# Altium PCB JBC_PD.PcbDoc
Units mm, origin at the board's own origin, x right, y up, seen from the top; angles counter-clockwise.
Board outline 70 x 40 mm, 2 copper layers (Top Layer, Bottom Layer); 61 components, 49 nets, 270 pads, 44 vias.
Unrouted connection lines stored in the file: 74.
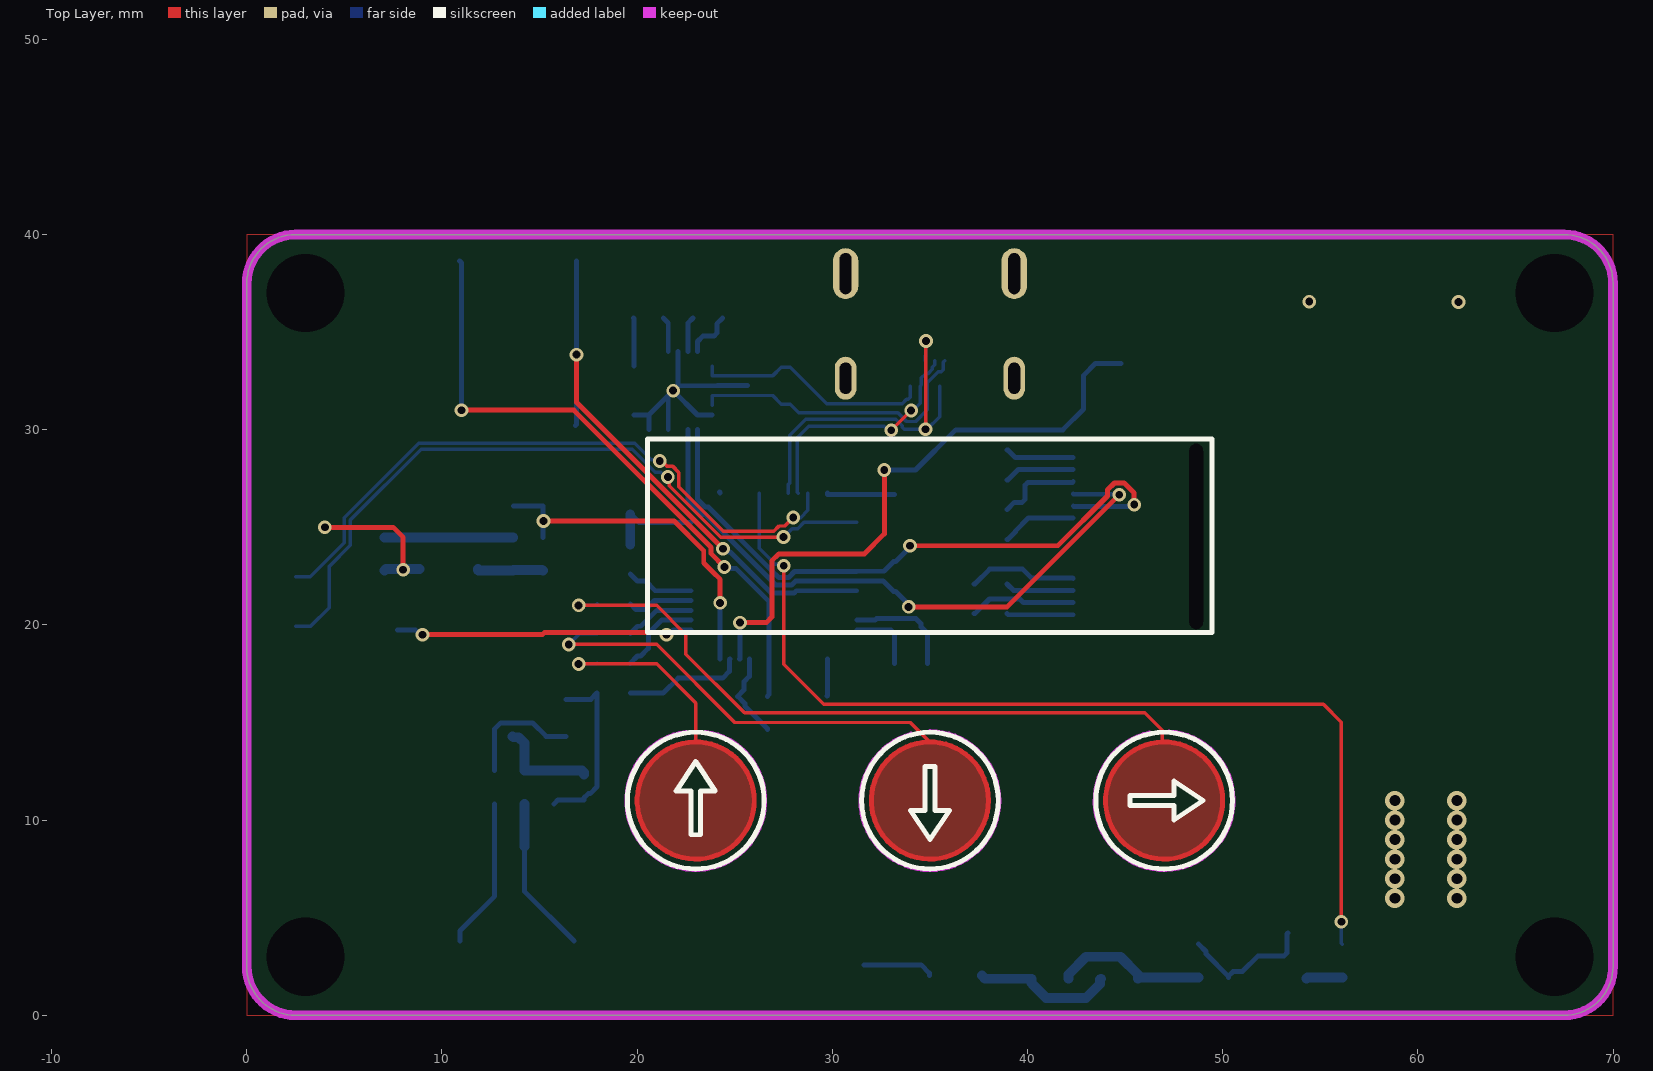
[diagram p0: Top Layer view]
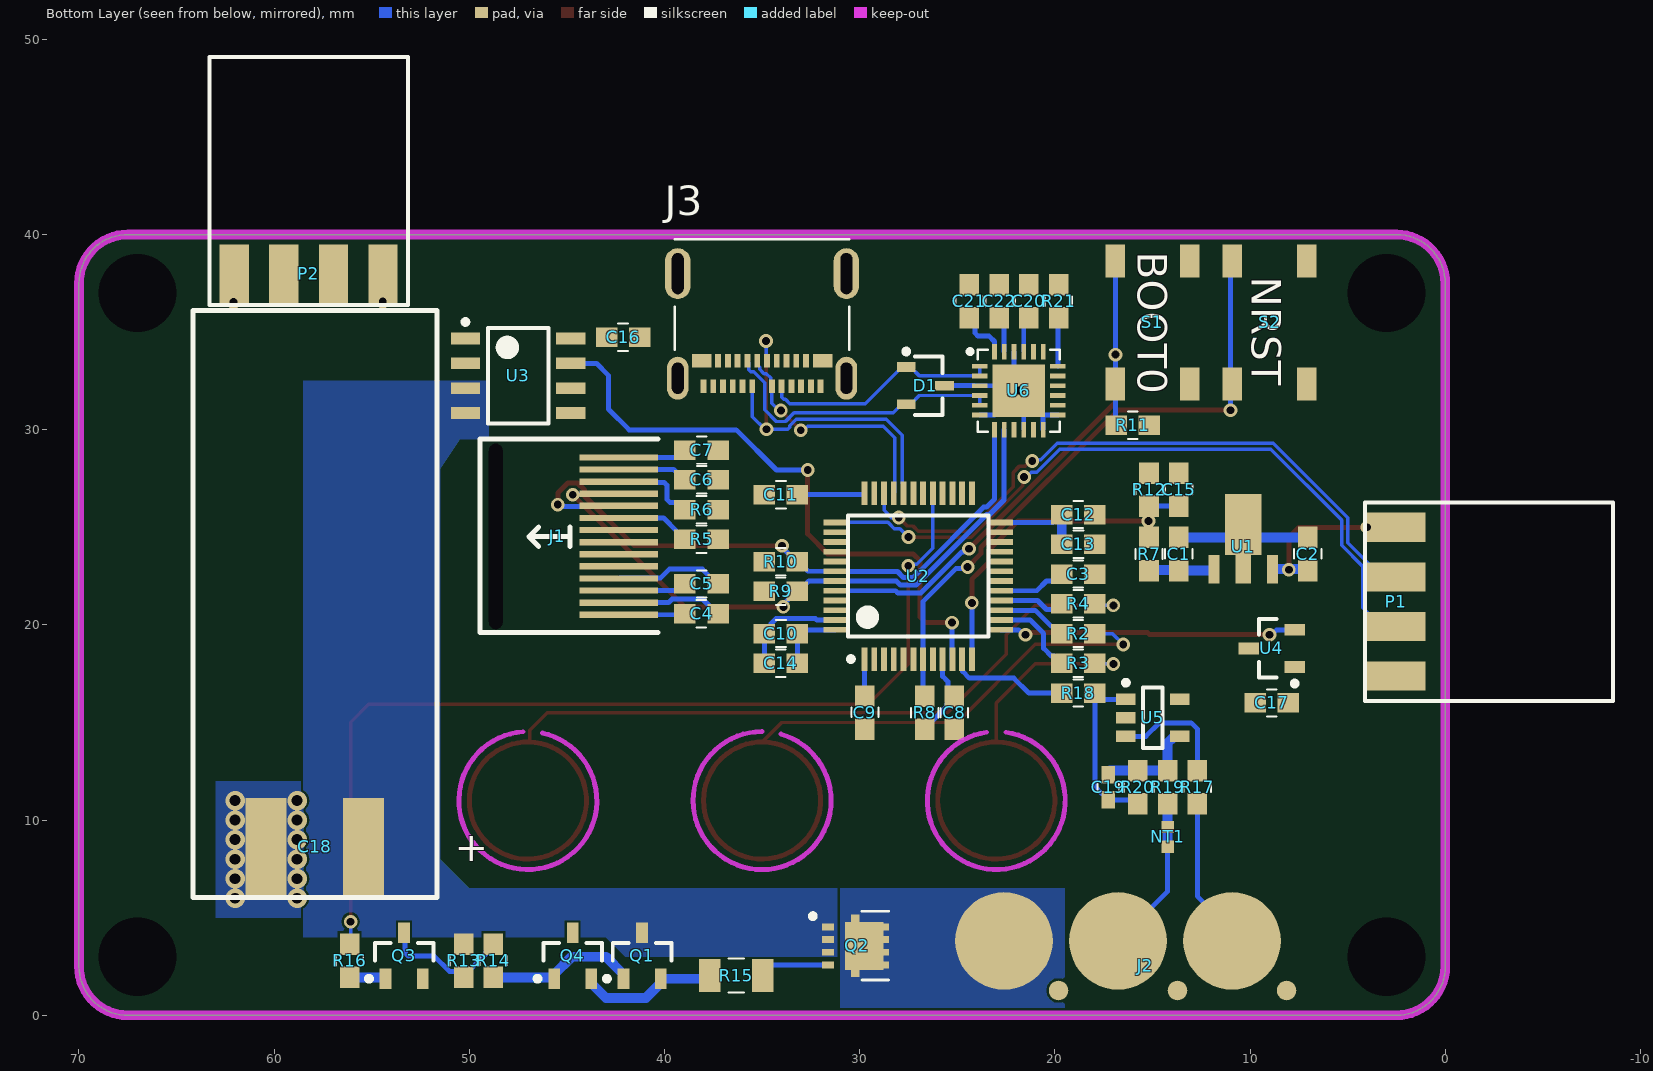
[diagram p1: Bottom Layer view, seen from below]
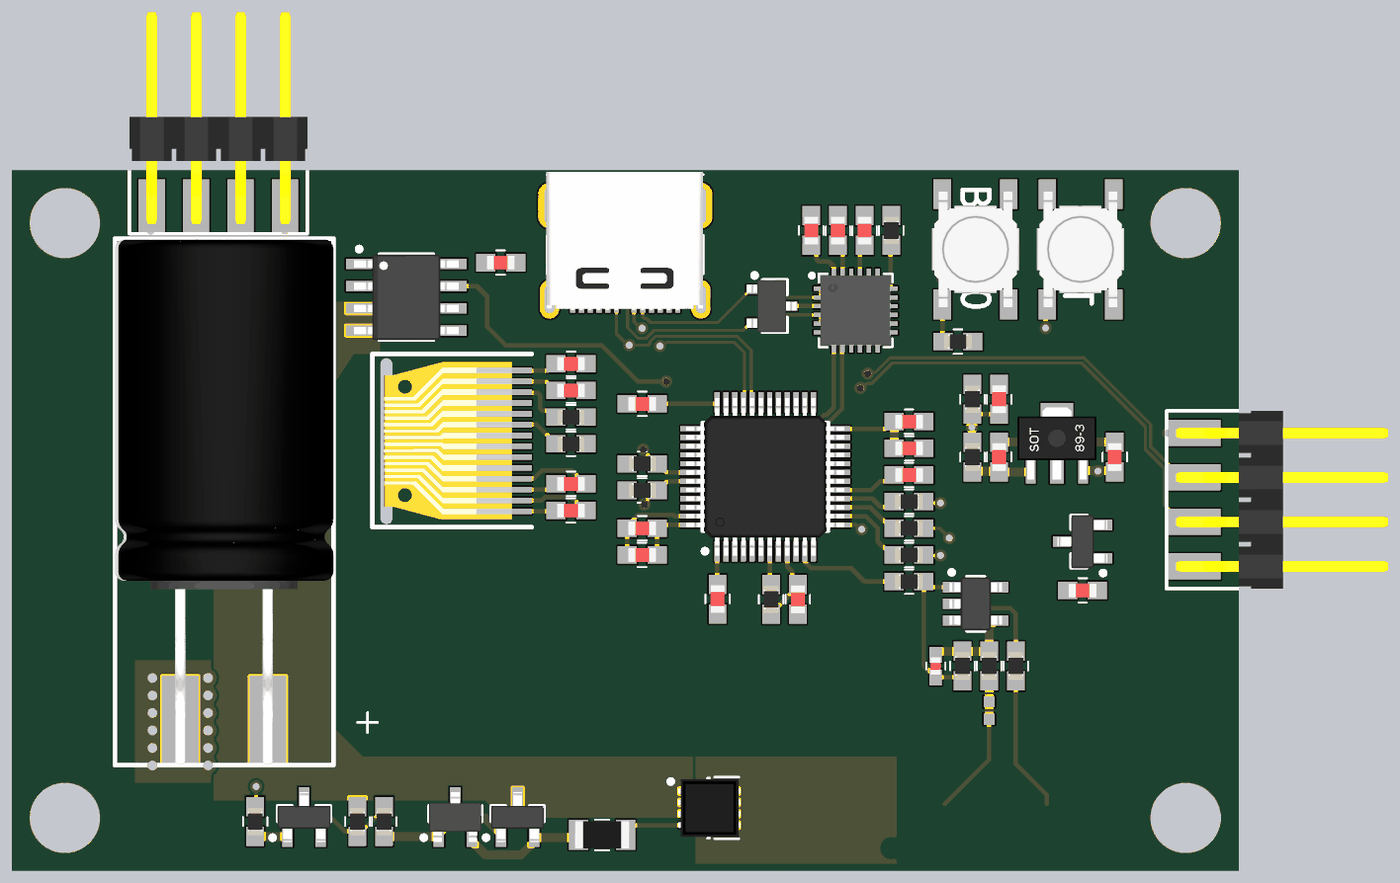
[diagram p2: 3D render of the assembled board from below, using the file's embedded part models]

## Layer stack, top to bottom
Top Solder: solder mask 0.0102, Solder Resist, Dk 3.5
Top Layer: signal copper 0.0356
Dielectric 1: dielectric 0.32, FR-4, Dk 4.8
Bottom Layer: signal copper 0.0356
Bottom Solder: solder mask 0.0102, Solder Resist, Dk 3.5

## Board outline
67.5,40 cw(c67.5,37.5) 70,37.5 70,2.5 cw(c67.5,2.5) 67.5,0 2.5,0 cw(c2.5,2.5) 0,2.5 0,37.5 cw(c2.5,37.5) 2.5,40

## Design rules (kind name [scope] priority, off if disabled: settings)
Clearance [All] p1: gap=0.127 ignorepadtopadclearanceinfootprint=FALSE
DiffPairsRouting [All] p1: maxlimit=0.381 minlimit=0.178 mostfreqgap=0.254 toplayer_minwidth=0.178 toplayer_maxwidth=0.381 toplayer_prefwidth=0.254 bottomlayer_minwidth=0.178 bottomlayer_maxwidth=0.381 bottomlayer_prefwidth=0.254 maxuncoupledlength=12.7
PolygonConnect PolygonConnect_2 [All vs IsNamedPolygon('NONET_L-01_P-001')] p1: connectstyle=Direct reliefconductorwidth=0.254 reliefentries=4 polygonreliefangle="90 Angle" airgapwidth=0.254
PolygonConnect PolygonConnect_1 [All vs IsNamedPolygon('POWER_OUT')] p2: connectstyle=Direct reliefconductorwidth=0.254 reliefentries=4 polygonreliefangle="90 Angle" airgapwidth=0.254
PolygonConnect [All] p3: connectstyle=Relief reliefconductorwidth=0.254 reliefentries=4 polygonreliefangle="90 Angle" airgapwidth=0.254
RoutingVias [All] p1: holewidth=0.711 width=1.27 viastyle="Through Hole" minholewidth=0.4 minwidth=0.7 maxholewidth=0.55 maxwidth=1
SolderMaskExpansion [All] p1: expansion=0.102 istentingtop=FALSE
Width [All] p1: maxlimit=0.508 minlimit=0.178 preferedwidth=0.254
29 further rules are at their usual default settings.

## Classes and differential pairs
component class USB: C20 C21 C22 D1 J3 P2 R21 U6
component class MCU: C1 C2 C3 C4 C5 C6 C7 C8 C9 C10 C11 C12 C13 C14 C15 J1 P1 R2 R3 R4 R5 R6 R7 R8 R9 R10 R11 R12 S1 S2 U1 U2
component class FrontEnd: C16 C17 C18 C19 J2 NT1 Q1 Q2 Q3 Q4 R13 R14 R15 R16 R17 R18 R19 R20 U3 U4 U5
differential pair USB: +USB_P -USB_N

## Components (designator, comment, footprint, x,y, rotation, side; value= is the part's Value field where it differs from the comment)
C1 "C0603 1uF 25V X7R" C0603-IPC 13.652,23.63 r90 bottom value=1uF
C2 "C0603 1uF 25V X7R" C0603-IPC 7.048,23.63 r90 bottom value=1uF
C3 "Cs 10nF 50V X7R" C0603-IPC 18.796,22.606 r0 bottom value=10nF
C4 "C0603 1uF 25V X7R" C0603-IPC 38.1,20.574 r0 bottom value=1uF
C5 "C0603 1uF 25V X7R" C0603-IPC 38.1,22.098 r180 bottom value=1uF
C6 "C0603 1uF 25V X7R" C0603-IPC 38.1,27.432 r180 bottom value=1uF
C7 "C0603 1uF 25V X7R" C0603-IPC 38.1,28.956 r180 bottom value=1uF
C8 "C0603 100nF 25V X7R" C0603-IPC 25.146,15.494 r90 bottom value=100nF
C9 "C0603 100nF 25V X7R" C0603-IPC 29.728,15.508 r90 bottom value=100nF
C10 "C0603 100nF 25V X7R" C0603-IPC 34.036,19.558 r180 bottom value=100nF
C11 "C0603 100nF 25V X7R" C0603-IPC 34.036,26.67 r180 bottom value=100nF
C12 "C0603 100nF 25V X7R" C0603-IPC 18.796,25.654 r0 bottom value=100nF
C13 "C0603 1uF 25V X7R" C0603-IPC 18.796,24.13 r180 bottom value=1uF
C14 "C0603 1uF 25V X7R" C0603-IPC 34.036,18.034 r0 bottom value=1uF
C15 "C0603 100nF 25V X7R" C0603-IPC 13.652,26.932 r270 bottom value=100nF
C16 "C0603 100nF 25V X7R" C0603-IPC 42.11,34.742 r0 bottom value=100nF
C17 "C0603 100nF 25V X7R" C0603-IPC 8.89,16.002 r180 bottom value=100nF
C18 "35ZLH1000MEFC12.5X20" "C-POLARIZED-5-12.5 Horizontal" 57.912,8.636 r180 bottom value=1000uF
C19 "C0402 18pF 50V C0G_1" C0402-IPC 17.272,11.684 r90 bottom value=18pF
C20 "C0603 1uF 10V X7R" C0603-IPC 21.336,36.576 r270 bottom value="1 uF"
C21 "C0603 100nF 25V X7R" C0603-IPC 24.384,36.576 r90 bottom value=100nF
C22 "C0603 1uF 10V X7R" C0603-IPC 22.86,36.576 r270 bottom value="1 uF"
D1 "ESDA25L" SOT23-3L 26.634,32.258 r180 bottom
J1 "0.69\" OLED Monochrome White" "OLED_64x32 Bent" 42.342,20.52 r180 bottom locked
J2 "RPC1-12RB-6P(71)" "HIROSE RPC 1 SMD (WIRE)" -6.096,7.442 r180 bottom
J3 "USB C" "Molex USB-C" 35,36 r0 bottom locked
NT1 "Net Tie" NET_TIE 14.224,9.144 r270 bottom net-tie
P1 "Header 1x4" "HEADER 1X4 SMD 2.54mm" 2.5,25 r270 bottom
P2 "Header 1x4" "HEADER 1X4 SMD 2.54mm" 62.04,38 r180 bottom
Q1 "MMBT3904LT1G" SOT23-MMBT3904 41.148,3.048 r90 bottom
Q2 "AON7401" DFN3x3A_8L_EP1_P 31.626,2.581 r180 bottom
Q3 "MMBT3904LT1G" SOT23-MMBT3904 53.34,3.048 r90 bottom
Q4 "MMBT3906LT1G" SOT23-Generic 44.704,3.048 r90 bottom
R2 "R0603 1K 1%" R0603-IPC 18.796,19.558 r0 bottom value=1k
R3 "R0603 1K 1%" R0603-IPC 18.796,18.034 r0 bottom value=1k
R4 "R0603 1K 1%" R0603-IPC 18.796,21.082 r0 bottom value=1k
R5 "R0603 10K 1%" R0603-IPC 38.1,24.384 r0 bottom value=10k
R6 "R0603 560K 1%" R0603-IPC 38.1,25.908 r0 bottom value=560k
R7 "R0603 560K 1%" R0603-IPC 15.176,23.63 r270 bottom value=560k
R8 "R0603 10K 1%" R0603-IPC 26.67,15.494 r270 bottom value=10k
R9 "R0603 10K 1%" R0603-IPC 34.036,21.717 r0 bottom value=10k
R10 "R0603 10K 1%" R0603-IPC 34.036,23.241 r0 bottom value=10k
R11 "R0603 10K 1%" R0603-IPC 16.002,30.226 r0 bottom value=10k
R12 "R0603 100K 1%" R0603-IPC 15.176,26.932 r270 bottom value=100k
R13 "R0603 2.37K 1%" R0603-IPC 50.292,2.794 r90 bottom value=2.37k
R14 "R0603 2.37K 1%" R0603-IPC 48.768,2.794 r270 bottom value=2.37k
R15 "R1206 20 1%" R1206-IPC 36.322,2.032 r180 bottom value=20
R16 "R0603 2.37K 1%" R0603-IPC 56.134,2.794 r270 bottom value=2.37k
R17 "R0603 100K 1%" R0603-IPC 12.7,11.684 r90 bottom value=100k
R18 "R0603 2.37K 1%" R0603-IPC 18.796,16.51 r180 bottom value=2.37k
R19 "R0603 2.37K 1%" R0603-IPC 14.224,11.684 r270 bottom value=2.37k
R20 "RC0603FR-07750KL" R0603-IPC 15.748,11.684 r90 bottom value=750K
R21 "R0603 1K 1%" R0603-IPC 19.812,36.576 r90 bottom value=1k
S1 "BOOT0" TL3342F260QG 15,35.5 r90 bottom
S2 "NRST" TL3342F260QG 9,35.5 r90 bottom
U1 "AP2204R-3.3TRG1" SOT-89 10.35,22.854 r180 bottom
U2 "STM32F072CXXX MCU" LQFP48 27,22.5 r90 bottom locked
U3 "ACS722LLCTR-05AB-T" SOIC127P600X175-8N 47.498,32.766 r180 bottom
U4 "MCP9700AT-ETT" SOT23 8.89,18.796 r0 bottom
U5 "OPA374AIDBVR" DBV0005A 14.986,15.24 r180 bottom
U6 "STUSB4500" "QFN24 - 4X4MM - PITCH 0.5MM - EXPOSEDPAD" 21.844,32.004 r180 bottom locked

## Footprints (in the part's own frame and the unit in brackets; to place one, negate y for a bottom-side part, rotate by r counter-clockwise, add the part's x,y. Pads: shape width x height; smd on the part's side, far side on the other; paste and mask are expansions set on the pad)
C0402-IPC [mm]
  rect 0.9x0.7 smd: 1(-0.65,0) 2(0.65,0)
  silkscreen extent -0.2,-0.55 0.2,0.55, body extent -0.5,-0.3 0.5,0.3, height 0.2
C0603-IPC [mm]
  rect 1.1x1 smd: 1(-0.85,0) 2(0.85,0)
  silkscreen extent -0.24,-0.7 0.26,0.7, body extent -0.8,-0.4 0.8,0.4, height 0.3
"C-POLARIZED-5-12.5 Horizontal" [mm] "Flat Mount Through-hole Capacitor"
  rect 2.1x5 smd: 1(2.5,-0.012) 2(-2.5,-0.012)
  silkscreen extent -6.24,-2.61 6.26,27.48, body extent -6.25,-2.57 6.25,27.43, height 12.52
DBV0005A [mm] "SOT23, 5-Leads, Body 2.90x2.80mm, Pitch 0.95mm, IPC Medium Density"
  rect 1x0.6 smd mask+0.075: 1(-1.375,0.95) 2(-1.375,0) 3(-1.375,-0.95) 4(1.375,-0.95) 5(1.375,0.95)
  silkscreen extent -1.5,-1.55 0.5,1.92, body extent -1.5,-1.53 1.5,1.53, height 1.45
DFN3x3A_8L_EP1_P [mm] "AON7401 P-Mos"
  rect 0.43x3.21 smd paste-3 mask+0: D(1.4,0.975)
  rect 1.98x2.45 smd paste-0.2: D(1.854,0.975)
  rect 0.3x0.35 smd: D(2.985,0) D(2.985,0.65) D(2.985,1.3) D(2.985,1.95)
  rect 0.6x0.35 smd: G(0,0) S(0,0.65) S(0,1.3) S(0,1.95)
  silkscreen extent -0.9,-0.77 3.1,2.75, body extent -0.34,-0.79 3.21,2.76, height 1.03
"HEADER 1X4 SMD 2.54mm" [mm] "Connector; Header; 4 Position"
  rect 1.5x3 smd: 1(0,0) 2(2.54,0) 3(5.08,0) 4(7.62,0)
  silkscreen extent -1.27,-1.6 8.89,11.1, body extent -1.27,-1.05 8.89,11.05, height 2.54
"HIROSE RPC 1 SMD (WIRE)" [mm] "6 Pin JBC Connector"
  round 5 smd: 1(-22.86,-3.632) 2(-17.018,-3.632) 5(-28.702,-3.632)
  round 1 smd: 3(-25.908,-6.172) 4(-19.812,-6.172) 6(-14.224,-6.172)
LQFP48 [mm] "TSQFP, 48-Leads, Body 7.00x8.00mm, Pitch 0.50mm, IPC Medium Density"
  rect 1.2x0.3 smd: 1(-4.25,2.75) 2(-4.25,2.25) 3(-4.25,1.75) 4(-4.25,1.25) 5(-4.25,0.75) 6(-4.25,0.25) 7(-4.25,-0.25) 8(-4.25,-0.75) 9(-4.25,-1.25) 10(-4.25,-1.75) 11(-4.25,-2.25) 12(-4.25,-2.75) 25(4.25,-2.75) 26(4.25,-2.25) 27(4.25,-1.75) 28(4.25,-1.25) 29(4.25,-0.75) 30(4.25,-0.25) 31(4.25,0.25) 32(4.25,0.75) 33(4.25,1.25) 34(4.25,1.75) 35(4.25,2.25) 36(4.25,2.75)
  rect 0.3x1.2 smd: 13(-2.75,-4.25) 14(-2.25,-4.25) 15(-1.75,-4.25) 16(-1.25,-4.25) 17(-0.75,-4.25) 18(-0.25,-4.25) 19(0.25,-4.25) 20(0.75,-4.25) 21(1.25,-4.25) 22(1.75,-4.25) 23(2.25,-4.25) 24(2.75,-4.25) 37(2.75,4.25) 38(2.25,4.25) 39(1.75,4.25) 40(1.25,4.25) 41(0.75,4.25) 42(0.25,4.25) 43(-0.25,4.25) 44(-0.75,4.25) 45(-1.25,4.25) 46(-1.75,4.25) 47(-2.25,4.25) 48(-2.75,4.25)
  silkscreen extent -4.37,-3.6 3.1,3.6, body extent -4.51,-4.51 4.51,4.51, height 1.5
"Molex USB-C" [mm] "MOLEX_105450-0101"
  rect 0.3x0.7 smd: A1(-3,3.77) A2(-2.5,3.77) A3(-2,3.77) A4(-1.5,3.77) A5(-1,3.77) A6(-0.5,3.77) A7(0.5,3.77) A8(1,3.77) A9(1.5,3.77) A10(2,3.77) A11(2.5,3.77) A12(3,3.77) B2(2.25,2.47) B3(1.75,2.47) B4(1.25,2.47) B5(0.75,2.47) B6(0.25,2.47) B7(-0.25,2.47) B8(-0.75,2.47) B9(-1.25,2.47) B10(-1.75,2.47) B11(-2.25,2.47)
  rect 1x0.7 smd: B1(3.1,2.47) B12(-3.1,2.47)
  oval 1.1x2.2 hole 0.6 slot 1.6 at 90 deg: S1(-4.32,3.36) S2(4.32,3.36)
  oval 1.3x2.6 hole 0.6 slot 2.1 at 90 deg: S3(-4.32,-2) S4(4.32,-2)
  silkscreen extent -4.47,-3.77 4.47,1.9, body extent -4.44,-3.92 4.5,3.98, height 3.22
NET_TIE [mm]
  rect 0.635x0.635 smd: 1(-0.5,0) 2(0.5,0)
  Top Layer lines w0.508: 0.5,0 -0.5,0
"OLED_64x32 Bent" [mm] "0.69\" OLED Bent"
  rect 4x0.32 smd: 1(0,0) 2(0,0.62) 3(0,1.24) 4(0,1.86) 5(0,2.48) 6(0,3.1) 7(0,3.72) 8(0,4.34) 9(0,4.96) 10(0,5.58) 11(0,6.2) 12(0,6.82) 13(0,7.44) 14(0,8.06)
  rect 0x0 hole 9.5 slot 0.7 at 0 deg unplated: 7(-6.3,4.015)
  silkscreen extent -7.1,-0.9 2,9, body extent -6.47,-0.47 21.47,8.53, height 1.51
"QFN24 - 4X4MM - PITCH 0.5MM - EXPOSEDPAD" [mm] "QFN24 - 4X4mm - pitch 0.5mm - ExposedPAD"
  rect 2.7x2.7 smd: 0(0,0)
  rect 0.8x0.25 smd: 1(-2,1.25) 2(-2,0.75) 3(-2,0.25) 4(-2,-0.25) 5(-2,-0.75) 6(-2,-1.25) 13(2,-1.25) 14(2,-0.75) 15(2,-0.25) 16(2,0.25) 17(2,0.75) 18(2,1.25)
  rect 0.25x0.8 smd: 7(-1.25,-2) 8(-0.75,-2) 9(-0.25,-2) 10(0.25,-2) 11(0.75,-2) 12(1.25,-2) 19(1.25,2) 20(0.75,2) 21(0.25,2) 22(-0.25,2) 23(-0.75,2) 24(-1.25,2)
  silkscreen extent -2.6,-2.1 2.1,2.1, body extent -2,-2 2,2, height 1
R0603-IPC [mm]
  rect 1.1x1 smd: 1(-0.85,0) 2(0.85,0)
  silkscreen extent -0.25,-0.7 0.25,0.7, body extent -0.77,-0.43 0.78,0.43, height 0.44
R1206-IPC [mm]
  rect 1.1x1.7 smd: 1(-1.35,0) 2(1.35,0)
  silkscreen extent -0.4,-0.87 0.4,0.87, body extent -1.55,-0.77 1.55,0.78, height 0.55
SOIC127P600X175-8N [mm] "SOIC, 8-Leads, Body 4.90x3.90mm, Pitch 1.27mm, IPC Medium Density"
  rect 1.5x0.6 smd: 1(-2.7,1.905) 2(-2.7,0.635) 3(-2.7,-0.635) 4(-2.7,-1.905) 5(2.7,-1.905) 6(2.7,-0.635) 7(2.7,0.635) 8(2.7,1.905)
  silkscreen extent -2.83,-2.45 1.55,2.88, body extent -3,-2.45 3,2.45, height 1.75
SOT23 [mm] "SOT23, 3-Leads, Body 2.92x2.37mm, Pitch 0.95mm, IPC Medium Density"
  rect 1.05x0.6 smd: 1(-1.175,0.95) 2(-1.175,-0.95) 3(1.175,0)
  silkscreen extent -1.3,-1.5 0.65,1.92, body extent -1.42,-1.52 1.42,1.52, height 1.11
SOT23-3L [mm] "SOT23, 3-Leads, Body 2.90x2.55mm, Pitch 0.95mm, IPC Medium Density"
  rect 0.95x0.5 smd: 1(-0.98,0.95) 2(-0.98,-0.95) 3(0.98,0)
  silkscreen extent -1.11,-1.5 0.87,1.87, body extent -1.42,-1.5 1.42,1.5, height 1.2
SOT23-Generic [mm] "SOT23, 3-Leads, Body 2.92x2.37mm, Pitch 0.95mm, IPC Medium Density"
  rect 1.05x0.6 smd: 1(-1.175,0.95) 2(-1.175,-0.95) 3(1.175,0)
  silkscreen extent -1.3,-1.5 0.65,1.93, body extent -1.42,-1.5 1.42,1.5, height 1.17
SOT23-MMBT3904 [mm] "SOT23, 3-Leads, Body 2.92x2.37mm, Pitch 0.95mm, IPC Medium Density"
  rect 1.05x0.6 smd: 1(-1.175,0.95) 2(-1.175,-0.95) 3(1.175,0)
  silkscreen extent -1.3,-1.5 0.65,1.93, body extent -1.42,-1.52 1.42,1.52, height 1.11
SOT-89 [mm] "SOT-89 for AP2204R"
  rect 0.55x1.475 smd: 1(-1.5,0) 3(1.5,0)
  rect 0.8x1.475 smd: 2(0,0)
  rect 1.85x3.125 smd: 2(0,2.3)
  body extent -2.25,-0.5 2.25,3.6, height 1.5
TL3342F260QG [mm] "SWITCH TACTILE SPST-NO 0.05A 12V"
  rect 1.7x1 smd: 1(-3.15,-1.9) 2(3.15,-1.9) 3(-3.15,1.9) 4(3.15,1.9)
  body extent -3.3,-2.5 3.3,2.5, height 1.46

## Part data
C1 C2 C4 C5 C6 C7 C13 C14: "CAP CER 1UF 25V X7R 0603", Max. Voltage=25V, Supplier Part Number 1=445-173615-1-ND, EIA Code=X7R, Features="Soft Termination", Supplier 1=Digi-Key
C3: library part "C0603 10nF 50V X7R", "CAP CER 10000PF 50V X7R 0603", Max. Voltage=50V, Supplier Part Number 1=490-10892-1-ND, EIA Code=X7R, Features="Soft Termination", Supplier 1=Digi-Key
C8 C9 C10 C11 C12 C15 C16 C17 C21: "Chip Capacitor, 0603, 100nF, 25V, X7R", Max. Voltage=25V, Supplier Part Number 1=490-1524-1-ND, EIA Code=X7R, Supplier 1=Digi-Key
C18: library part "C-THT 1000uF 35V Electrolytic", "1000uF ±20% 35V 12.5x20 10000Hrs @ 105℃ Radial,12.5x20mm Aluminum Electrolytic Capacitors - Leaded RoHS", Supplier Part Number 1=1189-1888-ND, Supplier 1=Digi-Key, Supplier 2=Mouser, Supplier 3=LCSC, Supplier Part Number 2=232-LH1000MEFC125X20, Supplier Part Number 3=C338194
C19: "Chip Capacitor, 0402, 18pF, 25V, C0G", Max. Voltage=25V, Supplier Part Number 1=399-14427-1-ND, EIA Code=C0G, Supplier 1=Digi-Key
C20 C22: "Chip Capacitor, 0603, 1uF +/- 0.1uF, 10V, X7R", Max. Voltage=10V, Supplier Part Number 1=1276-1946-1-ND, EIA Code=X7R, Supplier 1=Digi-Key
D1: "Dual Transil Array For ESD Protection in SOT23-3 Vbr = 25V", Manufacturer=STMicroelectronics, Supplier Part Number 1=497-4642-1-ND, Manufacturer Part Number=ESDA25L, Supplier 1=Digi-Key, Supplier 2=Mouser, Supplier 3=LCSC, Supplier Part Number 2=511-ESDA25L, Supplier Part Number 3=C95343
J1: library part OLED_64x32, "0.69\" OLED Direct Solder Monochrome White", Manufacturer Part Number=UG-9616TSWCG02, Supplier Part Number 1=C88335, Supplier 1=LCSC
J2: library part "Hirose RPC1", "6 Position Circular Connector Receptacle, Male Pins Solder Cup (JBC Iron Conn)", Supplier Part Number 1=HR1817-ND, Supplier 1=Digi-Key, Supplier 2=Mouser, Supplier Part Number 2=798-RPC112RB6P71
J3: "USB-C USB 3.1 Gen 2, Superspeed+_ Receptacle Connector 24 Position Surface Mount, Right Angle; Through Hole", Package=None, Supplier Part Number 1=WM12856CT-ND, Digi-Key_Part_Number=WM12856CT-ND, Digi-Key_Purchase_URL=https://www.digikey.tw/product-detail/en/molex/1054500101/WM12856CT-ND/5843891?utm_source=snapeda&utm_medium=aggregator&utm_campaign=symbol, MF=Molex, MP=1054500101, SnapEDA_Link=https://www.snapeda.com/parts/1054500101/Molex/view-part/448528/?ref=snap, Supplier 1=Digi-Key, Supplier 2=Mouser, Supplier 3=LCSC, Supplier Part Number 2=538-105450-0101, Supplier Part Number 3=C134092
P1 P2: "Header, 4-Pin", LatestRevisionDate=17-Jul-2002, LatestRevisionNote="Re-released for DXP Platform.", Publisher="Altium Limited"
Q1 Q3: "Bipolar (BJT) Transistor NPN 40V 200mA 300MHz 300mW Surface Mount SOT-23-3 (TO-236)", Supplier Part Number 1=MMBT3904LT1GOSDKR-ND, I_max=200mA, Supplier 1=Digi-Key, Supplier 2=Mouser, Supplier 3=LCSC, Supplier Part Number 2=863-MMBT3904LT1G, Supplier Part Number 3=C81464, V_brkdown=40V
Q2: "P-Channel 30V 12A (Ta), 35A (Tc) 3.1W (Ta), 29W (Tc) Surface Mount 8-DFN (3x3)", Supplier Part Number 1=785-1302-1-ND, Supplier 1=Digi-Key, Supplier 3=LCSC, Supplier Part Number 3=C124890
Q4: "Bipolar (BJT) Transistor PNP 40V 200mA 250MHz 300mW Surface Mount SOT-23-3 (TO-236)", Supplier Part Number 1=MMBT3906LT1GOSCT-ND, Supplier 1=Digi-Key, Supplier 2=Mouser, Supplier 3=LCSC, Supplier Part Number 2=863-MMBT3906LT1G, Supplier Part Number 3=C53444
R2 R3 R4 R21: "RES SMD 1K OHM 1% 1/10W 0603", Operating Temperature="-55°C ~ 155°C", Supplier Part Number 1=RMCF0603FG1K00CT-ND, Temperature Coefficient=±100ppm/°C, Tolerance=±1%, Features="Automotive AEC-Q200", Supplier 1=Digi-Key
R5 R8 R9 R10 R11: "RES SMD 10K OHM 1% 1/10W 0603", Supplier Part Number 1=RMCF0603FT10K0CT-ND, Supplier 1=Digi-Key
R6 R7: "RES 560K OHM 1% 1/10W 0603", Supplier Part Number 1=RMCF0603FT560KCT-ND, Supplier 1=Digi-Key
R12 R17: "RES SMD 100K OHM 1% 1/10W 0603", Supplier Part Number 1=RMCF0603FT100KCT-ND, Supplier 1=Digi-Key
R13 R14 R16 R18 R19: "RES SMD 2.37K OHM 1% 1/10W 0603", Supplier Part Number 1=P2.37KHCT-ND, Supplier 1=Digi-Key, Supplier 2=Mouser, Supplier 3=LCSC, Supplier Part Number 2=667-ERJ-3EKF2371V, Supplier Part Number 3=C403087
R15: "Chip Resistor, 1206, 20 ohms, 0.5W", Manufacturer="Stackpole Electronics Inc.", Manufacturer Part Number=RNCP1206FTD20R0, Supplier Part Number 1=RNCP1206FTD20R0CT-ND, Supplier 1=Digi-Key
R20: library part "R0603 750K 1%", "RES SMD 750K OHM 1% 1/10W 0603", Operating Temperature="-55°C ~ 155°C", Supplier Part Number 1=311-750KHRCT-ND, Temperature Coefficient=±100ppm/°C, Tolerance=±1%, Supplier 1=Digi-Key, Supplier 2=Mouser, Supplier 3=LCSC, Supplier Part Number 2=603-RC0603FR-07750KL, Supplier Part Number 3=C137684
S1 S2: library part "SWITCH TACTILE SPST", "SWITCH TACTILE SPST-NO 0.05A 12V", Manufacturer Part Number=TL3342F260QG, Supplier Part Number 1=EG5470CT-ND, Supplier 1=Digi-Key
U1: library part AP2204R, "Fixed 24V 3.3V 150mA SOT-89(SOT-89-3) Low Dropout Regulators(LDO)", Supplier Part Number 1=AP2204R-3.3TRG1DICT-ND, Supplier 1=Digi-Key, Supplier 2=Mouser, Supplier 3=LCSC, Supplier Part Number 2=621-AP2204R-3.3TRG1, Supplier Part Number 3=C156303
U2: library part STM32F072CXXX, "32-Bit FLASH ARM® Cortex®-M0 48MHz 1.65V ~ 3.6V LQFP-48_7x7x05P ST Microelectronics RoHS", Supplier Part Number 1=497-18747-1-ND, Supplier 1=Digi-Key, Supplier 2=Mouser, Supplier 3=LCSC, Supplier Part Number 2=511-STM32F072CBT6TR, Supplier Part Number 3=C81720
U3: library part ACS722, "Current Sensor 5A 1 Channel Hall Effect, Open Loop Bidirectional 8-SOIC (0.154\", 3.90mm Width)", Supplier Part Number 1=620-1634-1-ND, Supplier 1=Digi-Key, Supplier 3=LCSC, Supplier Part Number 3=C116613
U4: "Temperature Sensor Analog, Local -40°C ~ 125°C 10mV/°C SOT-23-3", Supplier Part Number 1=MCP9700AT-E/TTCT-ND, Supplier 1=Digi-Key, Supplier 2=Mouser, Supplier 3=LCSC, Supplier Part Number 2=579-MCP9700AT-E/TT, Supplier Part Number 3=C127949
U5: library part OPA374, "General Purpose 1 2.3V ~ 5.5V, ±1.15V ~ 2.75V 585uA 6.5MHz 5 V/us SOT-23-5 Precision OpAmps RoHS", Supplier Part Number 1=296-39129-1-ND, Supplier 1=Digi-Key, Supplier 2=Mouser, Supplier 3=LCSC, Supplier Part Number 2=595-OPA374AIDBVR, Supplier Part Number 3=C111859
U6: library part STUSB4500QTR, "Standalone USB PD controller  with SINK auto-run mode in QFN24 4x4mm", Manufacturer=STMicroelectronics, Supplier Part Number 1=497-18060-1-ND, Manufacturer’s ordering code=STUSB4500QTR, Part Number="Standalone USB PD controller  with SINK auto-run mode in QFN24 4x4mm", Supplier 1=Digi-Key, Supplier 2=Mouser, Supplier Part Number 2=511-STUSB4500QTR

## Free pads (board coordinates)
  round 0 hole 4: 2(3,3) 2(3,37) 2(67,3) 2(67,37)

## Via types
v1: diameter 0.7, hole 0.4, Top Layer to Bottom Layer, tented both sides, 31 vias
v2: diameter 1, hole 0.55, Top Layer to Bottom Layer, tented both sides, 12 vias
v3: diameter 0.7, hole 0.4, Top Layer to Bottom Layer, tented top, 1 vias

## Nets (pads, with @x,y where several pads share a name; then routed paths per layer and width w, separated by ;. In a path a pad name is that pad's centre, name@x,y a point inside that pad or via, vN(x,y) a via of type N, cw(c..) or ccw(c..) an arc to the next point about the centre after c; other vN are vias at no path point)
+3V3: C2.1 C8.2 C9.2 C10.2 C11.2 C12.2 C13.1 C14.1 C16.2 C17.2 J1.5 J1.8 P1.1 R5.1 R8.2 R9.2 R10.2 S1.1 S1.2 U1.3 U2.1 U2.9 U2.24 U2.36 U2.48 U3.8 U4.1 U5.5 | length 25.9
  Top Layer w0.254: v1(4,25) 7.5,25 8.009,24.491 v1(8.009,22.823)
  Bottom Layer w0.254: C12.2 19.696,25.654 20.1,25.25 U2.24 ; U2.9 25.75,17.368 25.476,17.094 25.476,16.674 C8.2 25.519,15.971 25.519,15.845 26.67,14.694 R8.2 ; C9.2 29.75,16.38 U2.1 ; U2.36 29.75,26.693 29.773,26.67 C11.2 ; U2.48 32.994,19.75 C10.2 C14.1
  Bottom Layer w0.508: C2.1 7.122,22.854 U1.3 ; C13.1 C12.2
BOOT0: R11.2 S1.3 S1.4 U2.44 | length 29.3
  Top Layer w0.254: v1(16.892,33.847) 16.892,31.403 v1(24.397,23.897)
  Bottom Layer w0.254: R11.2 16.9,30.274 S1.3 S1.4 ; v1(24.397,23.897) 24.518,23.897 24.678,23.737 24.763,23.737 26.866,21.634 28.041,21.634 28.157,21.75 U2.44
GND: C1.2 C2.2 C3.1 C6.2 C7.2 C8.1 C9.1 C10.1 C11.1 C12.1 C13.2 C14.2 C15.1 C16.1 C17.1 C18.2 C20.1 C21.2 C22.1 D1.3 J1.7 J2.1 J3.A1 J3.A12 J3.B1 J3.B12 J3.S1 J3.S2 J3.S3 J3.S4 NT1.2 P1.4 P2.1 P2.4 pad.2@3,37 Q3.2 Q4.3 R6.1 R11.1 R12.1 S2.1 S2.2 U1.2 U2.8 U2.23 U2.35 U2.47 U3.5 U3.6 U4.3 U5.2 U6.0 U6.3 U6.6 U6.10 U6.12 U6.13 U6.22 | length 31.3
  Bottom Layer w0.254: NT1.2 14.224,6.35 J2.1 ; U6.13 19.846,30.756 U6.0@20.596,30.756 ; U6.12 20.596,30.006 U6.0@20.596,30.756 ; U6.10 U6.0@21.594,31.754 ; U6.22 U6.0@22.094,32.254 ; U6.6 23.842,30.756 23.092,30.756 v3(21.844,32.004) ; D1.3 24.119,32.258 24.115,32.254 U6.3 U6.0@22.094,32.254 ; U2.47 32.188,20.25 32.258,20.32 34.29,20.32 34.544,20.066 34.544,19.9 C10.1 C14.2 ; U6.0@20.596,30.756 U6.0@21.594,31.754 ; U6.0@21.594,31.754 v3(21.844,32.004) ; v3(21.844,32.004) U6.0@22.094,32.254
  Bottom Layer w0.508: C2.2 C1.2
  other v1: 54.433,36.562 62.082,36.546
  other v2: 58.822,6 62,6 58.822,7 62,7 58.822,8 62,8 58.822,9 62,9 58.822,10 62,10 58.822,11 62,11
I2C_INT_N: U6.19
IIN_ADC: U2.10 U3.7 | length 31.5
  Top Layer w0.254: v1(25.273,20.117) 26.617,20.117 26.904,20.404 26.904,23.283 27.258,23.637 31.637,23.637 32.664,24.664 v1(32.664,27.94)
  Bottom Layer w0.254: U2.10 25.261,18.262 25.261,20.105 v1(25.273,20.117) ; v1(32.664,27.94) 34.265,27.94 36.322,29.997 41.808,29.997 42.875,31.064 42.875,32.791 43.485,33.401 U3.7
NetC3_2: C3.2 U2.17 | length 3.5
  Bottom Layer w0.254: C3.2 20.005,22.247 20.425,22.247 20.922,21.75 U2.17
NetC4_1: C4.1 J1.2 | length 5.5
  Bottom Layer w0.254: C4.1 37.3,20.574 38.054,21.328 39.605,21.328 39.793,21.14 J1.2
NetC4_2: C4.2 J1.1 | length 3.4
  Bottom Layer w0.254: C4.2 39.004,20.52 J1.1
NetC5_1: C5.1 J1.3 | length 3.5
  Bottom Layer w0.254: C5.1 39.288,21.76 J1.3
NetC5_2: C5.2 J1.4 | length 5.6
  Bottom Layer w0.254: C5.2 37.3,22.098 38.062,22.86 39.751,22.86 40.198,22.413 42.309,22.413 J1.4
NetC6_1: C6.1 J1.13 | length 3.6
  Bottom Layer w0.254: C6.1 39,27.432 39.528,27.96 J1.13
NetC7_1: C7.1 J1.14 | length 3.5
  Bottom Layer w0.254: C7.1 39,28.956 39.376,28.58 J1.14
NetC18_1: C18.1 Q1.3 Q2.S R13.2 U3.3 U3.4
NetC19_1: C19.1 R18.2 R20.1 U5.1 | length 9.1
  Bottom Layer w0.254: R20.1 15.948,11.034 C19.1 17.272,11.134 17.495,11.357 17.595,11.357 17.946,11.708 R18.2 17.626,16.19 U5.1
NetC19_2: C19.2 R19.1 R20.2 U5.4 | length 5.4
  Bottom Layer w0.508: U5.4 13.657,14.244 13.926,14.244 14.224,13.946 R19.1 R20.2 17.172,12.534 17.272,12.434 C19.2
NetC20_2: C20.2 U6.21 | length 1.8
  Bottom Layer w0.254: C20.2 21.594,35.468 U6.21
NetC22_2: C22.2 U6.23 | length 1.8
  Bottom Layer w0.254: U6.23 22.594,35.46 C22.2
NetD1_1: D1.1 J3.A5 U6.1 U6.2 | length 12.3
  Bottom Layer w0.178: U6.1 U6.2 26.935,32.754 27.389,33.208 27.839,33.208 29.723,31.324 33.572,31.324 33.802,31.554 33.896,31.554 34,31.658 J3.A5
NetD1_2: D1.2 J3.B5 U6.4 U6.5 | length 15.3
  Bottom Layer w0.178: U6.5 U6.4 26.943,31.754 27.389,31.308 27.839,31.308 28.286,30.861 33.363,30.861 33.802,30.422 34.27,30.422 34.866,31.018 34.866,32.41 35.42,32.964 35.586,32.964 35.69,33.068 35.69,33.47 J3.B5
NetJ1_9: J1.9 R5.2 | length 3.9
  Bottom Layer w0.254: R5.2 39,24.384 39.373,24.757 39.373,24.807 40.046,25.48 J1.9
NetJ1_12: J1.12 R6.2 | length 4.4
  Bottom Layer w0.254: R6.2 39.323,26.281 39.729,26.281 39.878,26.43 39.878,27.158 40.027,27.307 42.309,27.307 J1.12
NetJ2_5: J2.5 Q2.D
NetNT1_1: NT1.1 R19.2 | length 1.2
  Bottom Layer w0.508: NT1.1 R19.2
NetQ1_1: Q1.1 Q4.1 R14.2 | length 7.9
  Bottom Layer w0.508: Q1.1 42.098,2.098 42.997,2.997 44.755,2.997 45.654,2.098 Q4.1@45.654,1.898 ; Q4.1 Q4.1@45.654,1.898 ; R14.2 45.7,1.944 Q4.1@45.654,1.898
NetQ1_2: Q1.2 Q4.2 R15.1 | length 7.2
  Bottom Layer w0.508: R15.1 37.831,1.873 Q1.2 40.198,1.648 40.244,1.602 40.957,0.889 42.995,0.889 43.708,1.602 43.708,1.827 Q4.2
NetQ2_G: Q2.G R15.2 | length 3.6
  Bottom Layer w0.254: Q2.G 34.549,2.581 34.972,2.158 R15.2
NetQ3_1: Q3.1 R16.2 | length 1.9
  Bottom Layer w0.508: Q3.1 54.29,1.898 54.336,1.944 R16.2
NetQ3_3: Q3.3 R13.1 R14.1 | length 6.9
  Bottom Layer w0.254: R14.1 49.141,3.271 49.141,3.145 R13.1@50.292,1.994 ; R13.1 R13.1@50.292,1.994 ; Q3.3 53.294,4.177 53.294,3.197 53.145,3.048 51.816,3.048 51.008,2.24 50.538,2.24 R13.1@50.292,1.994
NetR2_2: R2.2 U2.15 | length 3.6
  Bottom Layer w0.254: R2.2 20.019,19.931 20.185,19.931 21.004,20.75 U2.15
NetR3_2: R3.2 U2.14 | length 4.5
  Bottom Layer w0.254: R3.2 20.019,18.407 20.185,18.407 20.574,18.796 20.574,19.558 21.266,20.25 U2.14
NetR4_2: R4.2 U2.16 | length 3.4
  Bottom Layer w0.254: R4.2 19.941,20.787 20.428,20.787 20.891,21.25 U2.16
NetR17_2: R17.2 U5.3 | length 6.2
  Bottom Layer w0.254: R17.2 12.7,14.675 13.011,14.986 14.641,14.986 15.337,14.29 U5.3
NetR21_1: R21.1 U6.18 | length 2.5
  Bottom Layer w0.254: R21.1 19.844,35.694 U6.18
NRST: R8.1 S2.3 S2.4 U2.7 | length 32.6
  Top Layer w0.254: v1(11,31) 16.756,31 23.793,23.963 23.793,23.647 v1(24.47,22.97)
  Bottom Layer w0.254: S2.4 11,38.55 v1(11,31) ; v1(24.47,22.97) 24.556,22.885 25.076,22.885 26.75,21.211 U2.7 26.75,16.424 R8.1
PWM_OUT: R16.1 U2.29 | length 50.7
  Top Layer w0.178: v1(27.508,23.033) 27.508,17.992 29.568,15.932 55.163,15.932 56.078,15.016 v1(56.078,4.796)
  Bottom Layer w0.178: U2.29 26.25,23.923 27.066,23.107 27.434,23.107 v1(27.508,23.033) ; v1(56.078,4.796) 56.078,3.7 R16.1
SCL: J1.10 R10.1 U2.42 U6.7 | length 33.8
  Top Layer w0.254: v1(33.977,24.055) 41.55,24.055 44.1,26.605 44.1,26.92 44.454,27.274 44.954,27.274 45.466,26.762 v1(45.466,26.162)
  Bottom Layer w0.254: U6.7 23.094,26.445 23.504,26.035 23.653,26.035 26.904,22.784 ; 26.904,22.783 27.258,22.429 27.758,22.429 28.063,22.733 31.233,22.733 U2.42 32.645,22.75 33.136,23.241 R10.1 33.236,23.241 33.977,23.982 v1(33.977,24.055) ; J1.10 42.375,26.067 44.453,26.067 44.454,26.066 45.249,26.066 45.345,26.162 v1(45.466,26.162)
SDA: J1.11 R9.1 U2.43 U6.8 | length 33
  Top Layer w0.254: v1(33.909,20.924) 38.958,20.924 v1(44.704,26.67)
  Bottom Layer w0.254: U6.8 22.604,29.994 22.604,26.396 23.346,25.654 23.495,25.654 26.515,22.634 ; 26.515,22.633 27.1,22.048 27.916,22.048 28.118,22.25 U2.43 32.603,22.25 33.136,21.717 R9.1 33.236,21.717 33.909,21.044 v1(33.909,20.924) ; J1.11 42.367,26.695 44.679,26.695 v1(44.704,26.67)
SW_DOWN: R2.1 | length 41.1
  Top Layer w0.178: v1(16.5,19) 21,19 25,15 34,15 35,14
  Top Layer w0.254: 38,11 ccw(c35,11) 38,11
  Bottom Layer w0.178: v1(16.5,19) 17.058,19.558 R2.1
SW_ENTER: R4.1 | length 53.6
  Top Layer w0.178: v1(17,21) 21,21 22.5,19.5 22.5,18.5 25.5,15.5 46,15.5 46.9,14.6 46.9,14.1 47,14
  Top Layer w0.254: 50,11 ccw(c47,11) 50,11
  Bottom Layer w0.178: v1(17,21) 17.864,21 R4.1
SW_UP: R3.1 | length 28.6
  Top Layer w0.178: v1(17,18) 21,18 23,16 23,14
  Top Layer w0.254: 26,11 ccw(c23,11) 26,11
  Bottom Layer w0.178: v1(17,18) 17.912,18 R3.1
SWCLK: P1.3 U2.37 | length 36.9
  Top Layer w0.178: v1(21.574,27.574) 21.648,27.501 21.648,27.132 21.909,26.87 24.28,24.5 v1(27.5,24.5)
  Bottom Layer w0.178: P1.3 3.25,19.92 4.216,20.886 4.216,22.995 5.305,24.084 5.305,25.374 8.931,29 19.755,29 20.924,27.831 21.209,27.831 21.466,27.574 v1(21.574,27.574) ; v1(27.5,24.5) 27.934,24.934 28.234,24.934 28.55,25.25 U2.37
SWDIO: P1.2 U2.34 | length 33.5
  Top Layer w0.178: v1(21.158,28.397) 21.267,28.397 21.523,28.14 21.809,28.14 22.14,27.809 22.14,27.07 24.406,24.805 27.004,24.805 27.267,25.067 27.567,25.067 v1(28,25.5)
  Bottom Layer w0.178: P1.2 3.25,22.46 5,24.21 5,25.5 8.805,29.305 19.881,29.305 20.715,28.471 21.085,28.471 v1(21.158,28.397) ; v1(28,25.5) 28.376,25.5 28.75,25.874 U2.34
TC_TIP: J2.2 R17.1 | length 7.8
  Bottom Layer w0.254: J2.2 10.922,4.328 12.7,6.106 R17.1
TEMP_IRON: R18.1 U2.11 | length 6.2
  Bottom Layer w0.254: R18.1 21.336,16.51 22.098,17.272 24.381,17.272 24.727,17.618 24.727,18.227 U2.11
TEMP_REF: U2.13 U4.2 | length 15.3
  Top Layer w0.254: v1(9,19.5) 15.146,19.5 15.25,19.604 21.275,19.604 21.379,19.5 v1(21.5,19.5)
  Bottom Layer w0.254: U4.2 8.633,19.746 8.879,19.5 v1(9,19.5) ; v1(21.5,19.5) 21.605,19.5 21.855,19.75 U2.13
USB_N: J3.A7 J3.B7 U2.32 | length 18.7
  Top Layer w0.178: v1(34.772,30.025) 34.785,30.038 34.785,34.531 v1(34.798,34.544)
  Bottom Layer w0.178: U2.32 27.75,27.2 27.811,27.261 27.811,27.363 27.813,27.365 27.813,29.713 28.638,30.538 33.254,30.538 33.586,30.206 33.586,30.129 33.69,30.025 v1(34.772,30.025) 34.851,30.025 35.5,30.674 J3.A7 ; J3.B7 34.75,33.767 34.774,33.791 34.774,34.52 v1(34.798,34.544)
USB_P: J3.A6 J3.B6 U2.33 | length 12.6
  Top Layer w0.178: v1(33.02,29.972) v1(34.036,30.988)
  Bottom Layer w0.178: U2.33 28.194,26.806 28.194,29.591 28.785,30.182 32.668,30.182 32.879,29.972 v1(33.02,29.972) ; v1(34.036,30.988) 34.123,30.988 34.5,31.365 J3.A6 34.561,32.291 34.561,32.659 34.777,32.875 34.9,32.875 35.116,33.091 35.116,33.196 35.25,33.33 J3.B6
VBUS: C1.1 C21.1 J3.A4 J3.A9 J3.B4 J3.B9 P2.2 P2.3 R7.2 R21.2 U1.1 U3.1 U3.2 U6.24 | length 6
  Bottom Layer w0.254: U6.24 23.094,34.524 23.368,34.798 23.934,34.798 24.082,34.947 24.082,35.424 C21.1
  Bottom Layer w0.508: U1.1 11.85,22.801 11.871,22.78 C1.1 ; C1.1@13.652,22.817 15.139,22.817 R7.2
VIN_ADC: C15.2 R7.1 R12.2 U2.12 | length 17.9
  Top Layer w0.254: v1(15.205,25.321) 21.896,25.321 23.412,23.805 23.412,23.174 23.858,22.728 24.25,22.336 v1(24.25,21.127)
  Bottom Layer w0.254: C15.2 R12.2 R7.1 ; U2.12 v1(24.25,21.127)
pads on no net: J1.6 J2.3 J2.4 J2.6 J3.A2 J3.A3 J3.A8 J3.A10 J3.A11 J3.B2 J3.B3 J3.B8 J3.B10 J3.B11 U2.2 U2.3 U2.4 U2.5 U2.6 U2.18 U2.19 U2.20 U2.21 U2.22 U2.25 U2.26 U2.27 U2.28 U2.30 U2.31 U2.38 U2.39 U2.40 U2.41 U2.45 U2.46 U6.9 U6.11 U6.14 U6.15 U6.16 U6.17 U6.20
copper on no net: | length 0.1
  Bottom Layer w0.254: 24.227,26.812 24.25,26.789 24.25,26.75

## Polygon pours and split planes (outlines as drawn)
GND on Top Layer "NONET_L-01_P-001" (solid, shelved, pour order 10): 0,0 70,0 70,40 0,40
SW_ENTER on Top Layer "NONET_L-01_P-001" (solid, pour order 3): 47.5,12 47.5,11.25 45.25,11.25 45.25,10.75 47.5,10.75 47.5,10 49,11 50,11 50,11.25 49.75,12 49.498,12.621 49,13.25 47.967,13.844 46.89,14.005 45.85,13.787 45.086,13.34 44.346,12.416 43.979,11.427 44.103,10.149 44.647,9.113 45.349,8.524 46.423,8.039 47.524,8.058 48.481,8.419 49.254,9.041 49.798,10.077 50,11 49,11
SW_DOWN on Top Layer "NONET_L-01_P-001" (solid, pour order 2): 36,10.5 35.25,10.5 35.25,12.75 34.75,12.75 34.75,10.5 34,10.5 35,9 35,8 35.25,8 36,8.25 36.621,8.502 37.25,9 37.844,10.033 38.005,11.11 37.787,12.15 37.34,12.914 36.416,13.654 35.427,14.021 34.149,13.897 33.113,13.353 32.524,12.651 32.039,11.577 32.058,10.476 32.419,9.519 33.041,8.746 34.077,8.202 35,8 35,9
SW_UP on Top Layer "NONET_L-01_P-001" (solid, pour order 0): 22,11.5 22.75,11.5 22.75,9.25 23.25,9.25 23.25,11.5 24,11.5 23,13 23,14 22.75,14 22,13.75 21.379,13.498 20.75,13 20.156,11.967 19.995,10.89 20.213,9.85 20.66,9.086 21.584,8.346 22.573,7.979 23.851,8.103 24.887,8.647 25.476,9.349 25.961,10.423 25.942,11.524 25.581,12.481 24.959,13.254 23.923,13.798 23,14 23,13
no net on Top Solder "NONET_L-01_P-001" (solid): 47.5,12 47.5,11.25 45.25,11.25 45.25,10.75 47.5,10.75 47.5,10 49,11
no net on Top Solder "NONET_L-01_P-001" (solid): 36,10.5 35.25,10.5 35.25,12.75 34.75,12.75 34.75,10.5 34,10.5 35,9
no net on Top Solder "NONET_L-01_P-001" (solid): 22,11.5 22.75,11.5 22.75,9.25 23.25,9.25 23.25,11.5 24,11.5 23,13
GND on Bottom Layer "NONET_L-01_P-001" (solid, pour order 11): 63,5 58,5 58,12 63,12
NetC18_1 on Bottom Layer "NONET_L-01_P-001" (solid, pour order 9): 51.5,19.5 51.5,28 50.5,29.5 58,29.5 58.5,29 58.5,19.5
NetC18_1 on Bottom Layer "NONET_L-01_P-001" (solid, pour order 8): 58.5,32.5 58.5,4 43,4 42,3 31,3 31,6.5 50,6.5 51.5,8 51.5,28 50.5,29.5 48.991,29.5 49.018,32.5 52.5,32.5
NetJ2_5 on Bottom Layer "POWER_OUT" (solid, pour order 7): 31,0 31,6.5 19.5,6.5 19.5,0
no net on Bottom Layer "NONET_L-01_P-001" (solid, pour order 6): 31.09,0
no net on Bottom Layer "NONET_L-01_P-001" (solid, pour order 5): 31.09,0
no net on Bottom Layer "NONET_L-01_P-001" (solid, pour order 4): 31.09,0

## Keep-outs
Keep-Out Layer:
  lines w0.254: 22.5,14.5 ccw(c23,11) 23.5,14.5 ; 34.029,14.4 ccw(c35,11) 35,14.536 ; 46.259,14.457 ccw(c47,11) 47.252,14.527
  lines w0.5: 0,2.5 ccw(c2.5,2.5) 2.5,0 67.5,0 ccw(c67.5,2.5) 70,2.5 70,37.5 ccw(c67.5,37.5) 67.5,40 2.5,40 ccw(c2.5,37.5) 0,37.5 0,2.5

## Silkscreen, mask and mechanical layers (free items; w line width, h text height)
Top Overlay:
  circle w0.254: c23,11 r3.5
  circle w0.254: c47,11 r3.5
  circle w0.254: c35,11 r3.5
  lines w0.254: 22,11.5 23,13 24,11.5 23.25,11.5 23.25,9.25 22.75,9.25 22.75,11.5 22,11.5 ; 34,10.5 34.75,10.5 34.75,12.75 35.25,12.75 35.25,10.5 36,10.5 35,9 34,10.5 ; 45.25,10.75 45.25,11.25 47.5,11.25 47.5,12 49,11 47.5,10 47.5,10.75 45.25,10.75
Top Solder:
  circle w0.254: c35,11 r3.242
  circle w0.254: c47,11 r3.242
  circle w0.254: c23,11 r3.242
  lines w0.254: 22,11.5 22.75,11.5 22.75,9.25 23.25,9.25 23.25,11.5 24,11.5 23,13 22,11.5 ; 34,10.5 34.75,10.5 34.75,12.75 35.25,12.75 35.25,10.5 36,10.5 35,9 34,10.5 ; 45.25,10.75 45.25,11.25 47.5,11.25 47.5,12 49,11 47.5,10 47.5,10.75 45.25,10.75

## Text inside footprints (layer, text, board x,y; h text height)
C18: Bottom Overlay "+" at 50.742,7.886 h1.5